# Altium PCB PCB1.pcbdoc
Units mil, origin at the board's own origin, x right, y up, seen from the top; angles counter-clockwise.
Board outline 2175 x 1010 mil, 2 copper layers (Top Layer, Bottom Layer); 37 components, 46 nets, 154 pads, 0 vias.
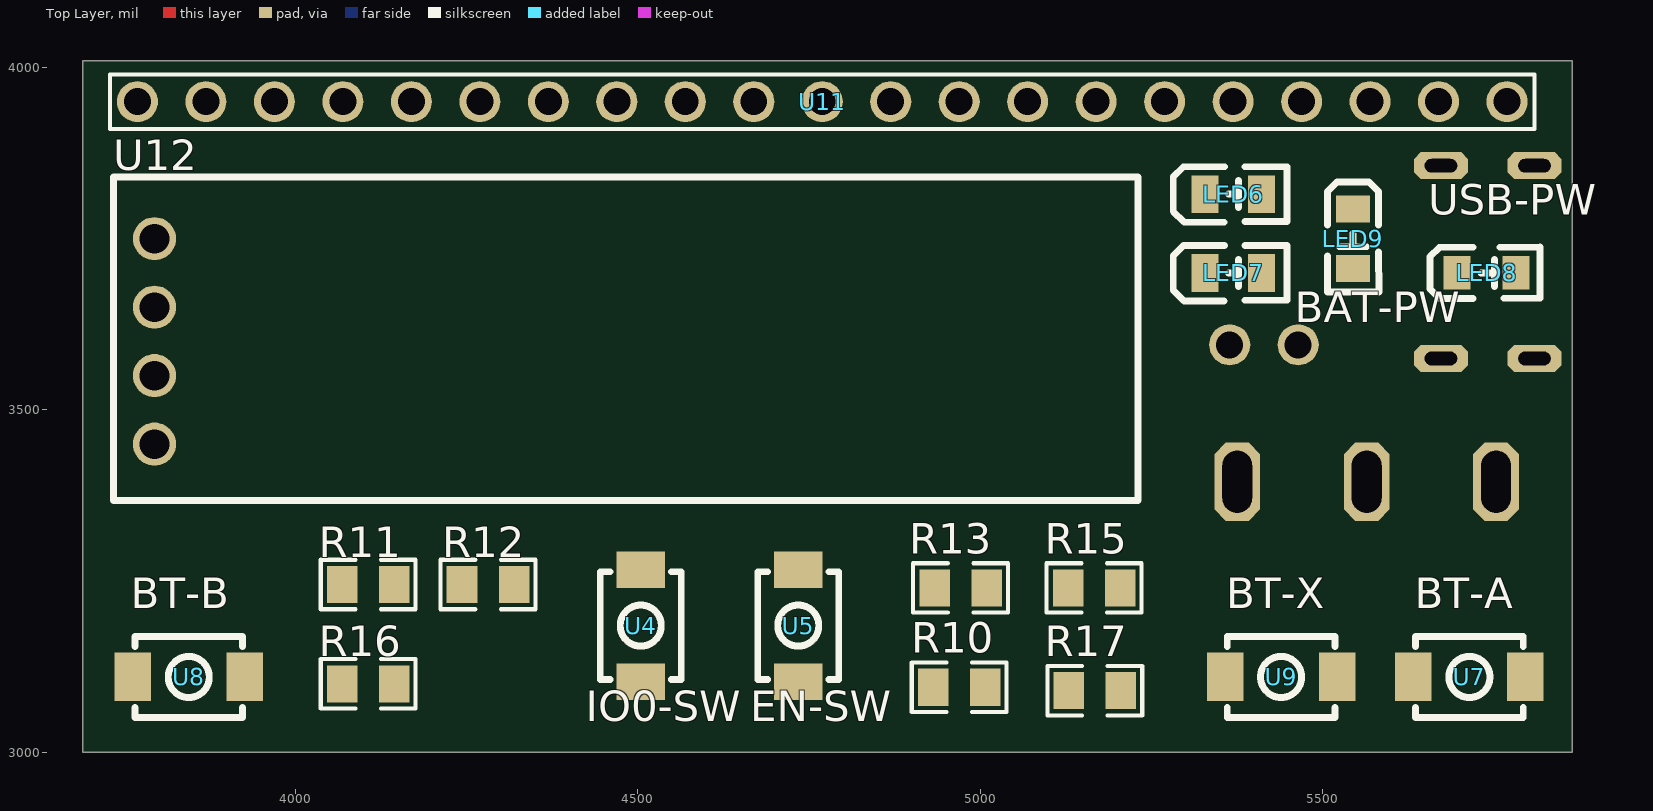
[diagram p0: Top Layer view]
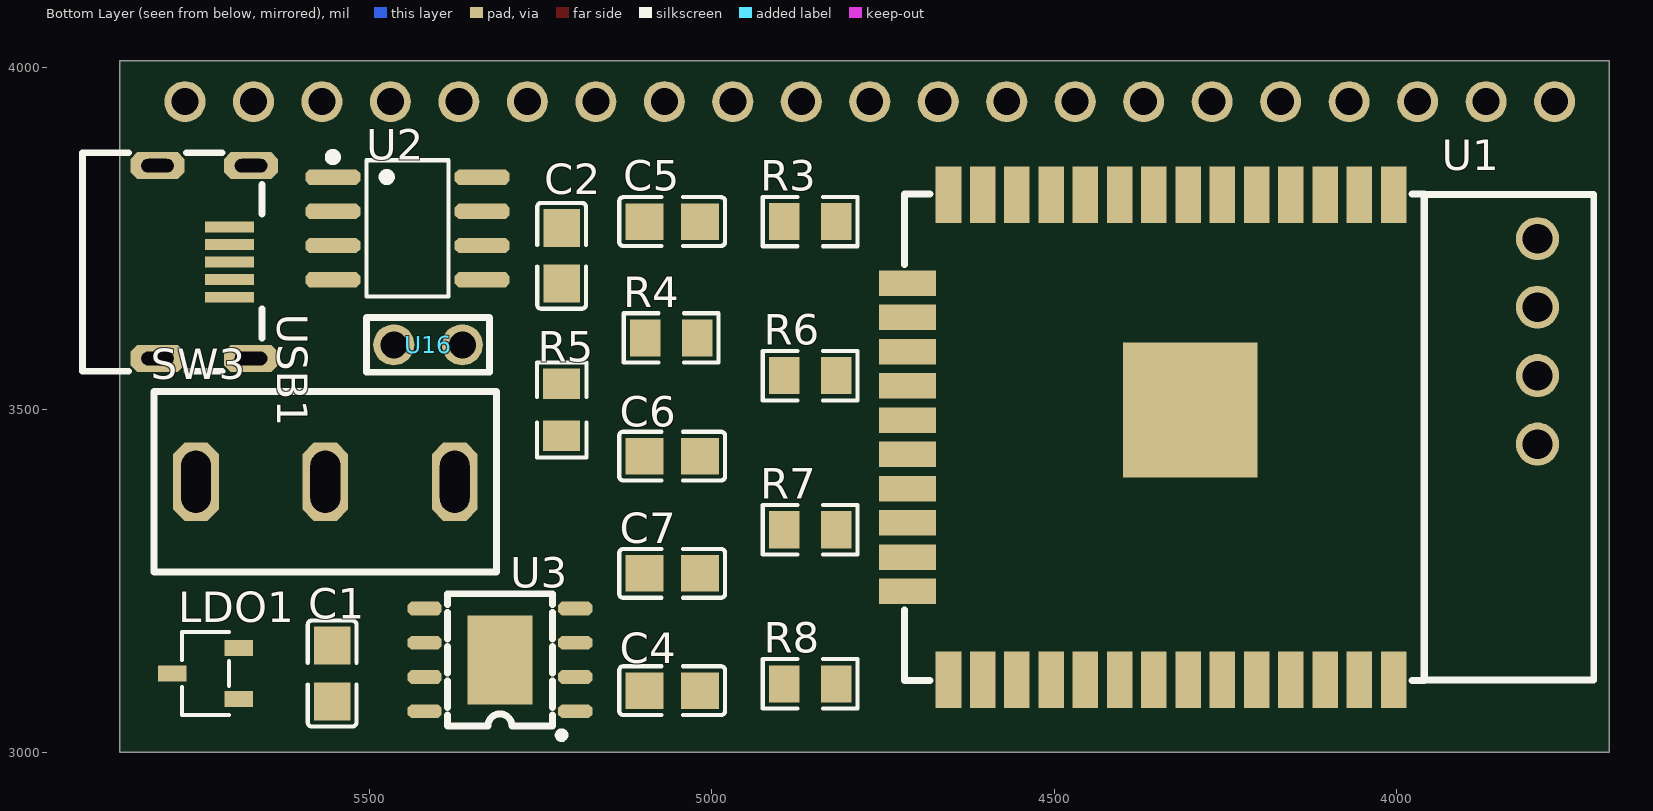
[diagram p1: Bottom Layer view, seen from below]

## Layer stack, top to bottom
Top Solder: solder mask 0.4, Solder Resist, Dk 3.5
Top Layer: signal copper 1.4
Dielectric 1: dielectric 12.6, FR-4, Dk 4.8
Bottom Layer: signal copper 1.4
Bottom Solder: solder mask 0.4, Solder Resist, Dk 3.5

## Board outline
3689.55,3000 5864.55,3000 5864.55,4010 3689.55,4010

## Components (designator, comment, footprint, x,y, rotation, side; value= is the part's Value field where it differs from the comment)
C1 "" C0805 5554.55,3115 r90 bottom
C2 "" C0805 5219.55,3725 r270 bottom
C4 "" C0805 5058.04,3090 r180 bottom
C5 "" C0805 5058.04,3775 r180 bottom
C6 "" C0805 5058.04,3432.5 r180 bottom
C7 "" C0805 5058.04,3261.25 r180 bottom
LDO1 "" SOT-23-3_L2.9-W1.6-P1.90-LS2.8-BR 5739.55,3115 r180 bottom
LED6 "" LED0805-R-RD 5369.55,3815 r0 top
LED7 "" LED0805-R-RD 5369.55,3700 r0 top
LED8 "USB-PW" LED0805-RD_RED 5739.55,3700 r0 top
LED9 "BAT-PW" LED0805-RD_RED 5544.55,3750 r270 top
R3 "" R0805 4856.55,3775 r180 bottom
R4 "" R0805 5059.55,3605 r180 bottom
R5 "" R0805 5219.55,3500 r270 bottom
R6 "" R0805 4856.55,3550 r180 bottom
R7 "" R0805 4856.55,3325 r180 bottom
R8 "" R0805 4856.55,3100 r180 bottom
R10 "" R0805 4969.55,3095 r0 top
R11 "" R0805 4106.55,3245 r0 top
R12 "" R0805 4281.55,3245 r0 top
R13 "" R0805 4971.55,3240 r0 top
R15 "" R0805 5166.55,3240 r180 top
R16 "" R0805 4106.55,3100 r0 top
R17 "" R0805 5167.55,3090 r0 top
SW3 "" SW-TH_SHOU-HAN_SS12D10G4 5564.55,3395 r180 bottom
U1 "" WIFIM-SMD_39P-L25.5-W18.0-P1.27-BL 4359.55,3460 r0 bottom
U2 "" SOP-8_L5.0-W4.0-P1.27-LS6.0-BL 5444.55,3765 r270 bottom
U3 "" SOP-8_L4.9-W3.9-P1.27-LS6.0-TL-EP-1 5309.55,3135 r0 bottom
U4 "IO0-SW" SW-SMD_L4.0-W3.0-LS4.8-1 4504.55,3185 r90 top
U5 "EN-SW" SW-SMD_L4.0-W3.0-LS4.8-1 4734.55,3185 r90 top
U7 "BT-A" SW-SMD_L4.0-W3.0-LS4.8-1 5714.55,3110 r180 top
U8 "BT-B" SW-SMD_L4.0-W3.0-LS4.8-1 3844.55,3110 r180 top
U9 "BT-X" SW-SMD_L4.0-W3.0-LS4.8-1 5439.55,3110 r180 top
U11 "" "ESP32 Pioneer OUT PIN20" 3669.55,4065 r0 top
U12 "" "0.91寸 OLED 屏幕模块" 3774.55,3670 r0 top
U16 "" "Battery Pin" 5524.55,3555 r90 bottom
USB1 "" MICRO-USB 5741.25,3715.8 r270 bottom

## Footprints (in the part's own frame and the unit in brackets; to place one, negate y for a bottom-side part, rotate by r counter-clockwise, add the part's x,y. Pads: shape width x height; smd on the part's side, far side on the other; paste and mask are expansions set on the pad)
"0.91寸 OLED 屏幕模块" [mm]
  round 1.6 hole 1.1: 1(0.508,2.032) 2(0.508,-0.508) 3(0.508,-3.048) 4(0.508,-5.588)
  silkscreen extent -1.02,-7.68 36.98,4.32
"Battery Pin" [mil]
  round 60 hole 39.37: 1(40,-60) 2(40,-160)
  silkscreen extent 0,-200 80,-20
C0805 [mil]
  rect 55.5x53.2 smd: 1(-40.5,0) 2(40.6,0)
  silkscreen extent -77,-36 77,36
"ESP32 Pioneer OUT PIN20" [mil]
  round 60 hole 39.37: 1(100,-115) 2(200,-115) 3(300,-115) 4(400,-115) 5(500,-115) 6(600,-115) 7(700,-115) 8(800,-115) 9(900,-115) 10(1000,-115) 11(1100,-115) 12(1200,-115) 13(1300,-115) 14(1400,-115) 15(1500,-115) 16(1600,-115) 17(1700,-115) 18(1800,-115) 19(1900,-115) 20(2000,-115) 21(2100,-115)
  silkscreen extent 60,-155 2140,-75
LED0805-R-RD [mil]
  rect 39.4x55.1 smd: 1(41.4,0) 2(-41.3,0)
  silkscreen extent -88,-41 78,40
LED0805-RD_RED [mil]
  rect 39.4x49.2 smd: 1(-43.3,0) 2(43.3,0)
  silkscreen extent -83,-37 78,38
MICRO-USB [mil]
  oct 39.4x78.7 hole 19.7 slot 47.2 at 90 deg: 0(-140.7,-68.3) 0(-140.7,68.3) 0(140.8,-68.3) 0(140.8,68.3)
  rect 15.7x70.9 smd: 1(-51.2,36.8) 2(-25.6,36.8) 3(0,36.8) 4(25.6,36.8) 5(51.2,36.8)
  silkscreen extent -160,-178 159,84
R0805 [mil]
  rect 44.6x54.2 smd: 1(-38,0) 2(38,0)
  silkscreen extent -69,-36 69,36
SOP-8_L4.9-W3.9-P1.27-LS6.0-TL-EP-1 [mil]
  oct 50x20 smd: 1(-110,75) 2(-110,25) 3(-110,-25) 4(-110,-75) 5(110,-75) 6(110,-25) 7(110,25) 8(110,75)
  rect 94.5x129.9 smd: 9(0,0)
  silkscreen extent -95,-96 77,115
SOP-8_L5.0-W4.0-P1.27-LS6.0-BL [mil]
  oct 22.6x80.1 smd: 1(-75,-109) 2(-25,-109) 3(25,-109) 4(75,-109) 5(75,109) 6(25,109) 7(-25,109) 8(-75,109)
  silkscreen extent -110,-115 100,60
SOT-23-3_L2.9-W1.6-P1.90-LS2.8-BR [mil]
  rect 42.1x23.6 smd: 1(48.6,-37.4) 2(48.6,37.4) 3(-48.6,0)
  silkscreen extent -35,-61 35,61
SW-SMD_L4.0-W3.0-LS4.8-1 [mil]
  rect 53.2x70.9 smd: 1(-81.7,0) 2(81.7,0)
  silkscreen extent -79,-59 79,59
SW-TH_SHOU-HAN_SS12D10G4 [mil]
  oct 66.9x114.2 hole 43.3 slot 90.6 at 90 deg: 1(-189,0) 2(0,0) 3(189,0)
  silkscreen extent -250,-132 250,132
WIFIM-SMD_39P-L25.5-W18.0-P1.27-BL [mil]
  rect 37.4x82.7 smd: 1(-354.9,-354.3) 2(-304.9,-354.3) 3(-254.9,-354.3) 4(-204.9,-354.3) 5(-154.9,-354.3) 6(-104.9,-354.3) 7(-54.9,-354.3) 8(-4.9,-354.3) 9(45.1,-354.3) 10(95.1,-354.3) 11(145.1,-354.3) 12(195.1,-354.3) 13(245.1,-354.3) 14(295.1,-354.3) 25(295.1,354.3) 26(245.1,354.3) 27(195.1,354.3) 28(145.1,354.3) 29(95.1,354.3) 30(45.1,354.3) 31(-4.9,354.3) 32(-54.9,354.3) 33(-104.9,354.3) 34(-154.9,354.3) 35(-204.9,354.3) 36(-254.9,354.3) 37(-304.9,354.3) 38(-354.9,354.3)
  rect 82.7x37.4 smd: 15(354.9,-225) 16(354.9,-175) 17(354.9,-125) 18(354.9,-75) 19(354.9,-25) 20(354.9,25) 21(354.9,75) 22(354.9,125) 23(354.9,175) 24(354.9,225)
  rect 196.9x196.9 smd: 39(-58,-40)
  silkscreen extent -647,-355 359,355

## Nets (pads, with @x,y where several pads share a name; then routed paths per layer and width w, separated by ;. In a path a pad name is that pad's centre, name@x,y a point inside that pad or via, vN(x,y) a via of type N, cw(c..) or ccw(c..) an arc to the next point about the centre after c; other vN are vias at no path point)
3.3VCC: C4.1 C7.1 LDO1.2 LED9.2 R10.2 R11.2 U1.2 U2.8 U7.2 U8.2 U9.2 U12.3
5VCC: C2.1 LED8.2 R3.2 U2.5 USB1.1
#EN: R11.1 R13.2 U1.3
$1N895: U2.2 USB1.2
$1N898: U2.1 USB1.3
$1N3593: C1.2 LDO1.3 SW3.2
$1N4478: C5.1 LED6.1 LED7.1 R3.1 U3.4 U3.8
$1N5919: R4.2 U3.6
$1N6247: R6.2 U3.2
$1N9796: R12.1 U4.2
$1N9811: R13.1 U5.2
$1N11743: LED9.1 R8.2
$1N11760: LED6.2 R5.1
$1N11761: LED7.2 R4.1
$1N12000: R5.2 U3.7
$1N12034: LED8.1 R7.2
BAT-VCC: C6.1 SW3.3 U3.5 U16.1
BUTTON1: R15.2 U1.4 U7.1
BUTTON2: R16.2 U1.5 U8.1
BUTTON3: R17.2 U1.6 U9.1
ESP-RXD: U1.34 U2.6
ESP-TXD: U1.35 U2.7
GND: C1.1 C2.2 C4.2 C5.2 C6.2 C7.2 LDO1.1 R6.1 R7.1 R8.1 R15.1 R16.1 R17.1 U1.1 U2.3 U3.1 U3.3 U4.1 U5.1 U12.4 U16.2 USB1.0 USB1.5
IO0: R10.1 R12.2 U1.25
IO2: U1.24 U11.10
IO4: U1.26 U11.9
IO5: U1.29 U11.6
IO12: U1.14 U11.19
IO13: U1.16 U11.20
IO14: U1.13 U11.18
IO15: U1.23 U11.11
IO16: U1.27 U11.8
IO17: U1.28 U11.7
IO18: U1.30 U11.5
IO19: U1.31 U11.4
IO21: U1.33 U11.3
IO25: U1.10 U11.15
IO26: U1.11 U11.16
IO27: U1.12 U11.17
IO32: U1.8 U11.12
IO33: U1.9 U11.13
IO35: U1.7 U11.14
IOGND: U1.15 U1.38 U1.39 U11.1 U11.2 U11.21
SCL: U1.36 U12.2
SDA: U1.37 U12.1
"": SW3.1 U1.17 U1.18 U1.19 U1.20 U1.21 U1.22 U1.32 U2.4 U3.9 USB1.4